# Altium PCB 海关全向控制器Pad转接板V2.PcbDoc
Units mm, origin at the board's own origin, x right, y up, seen from the top; angles counter-clockwise.
Board outline 32 x 10 mm, 2 copper layers (Top Layer, Bottom Layer); 5 components, 7 nets, 27 pads, 0 vias.
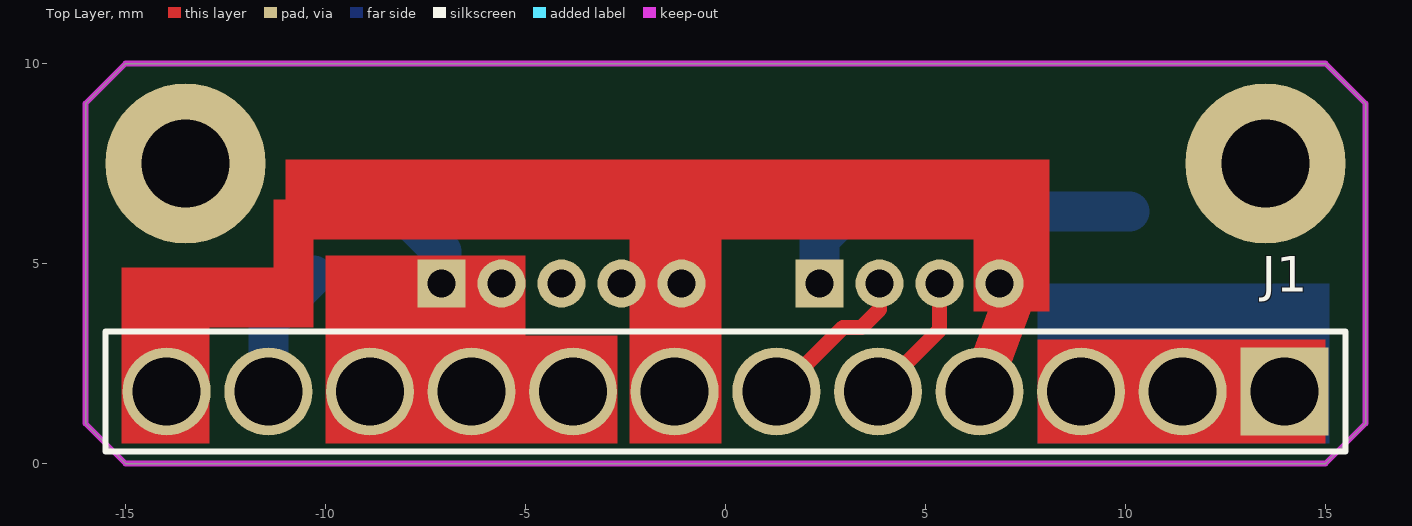
[diagram p0: Top Layer view]
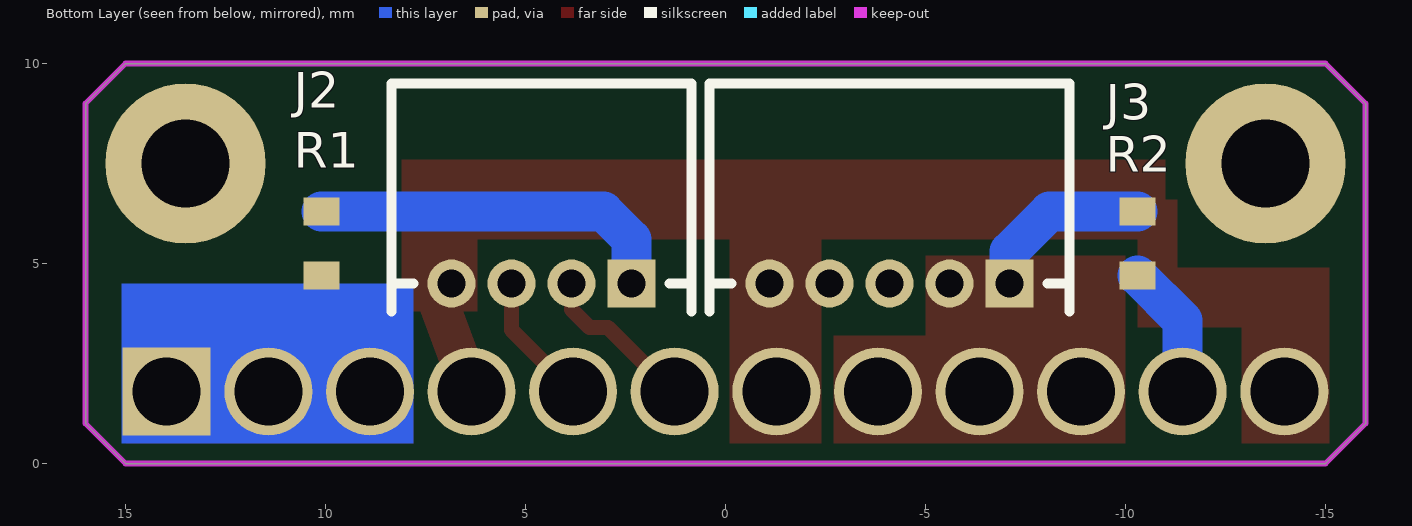
[diagram p1: Bottom Layer view, seen from below]
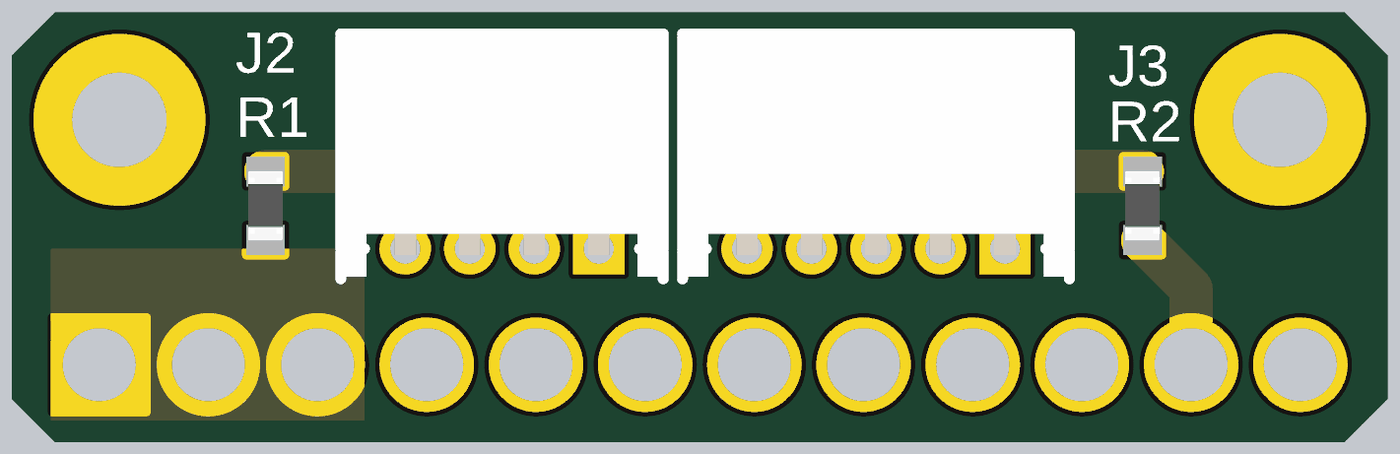
[diagram p2: 3D render of the assembled board from below, using the file's embedded part models]

## Layer stack, top to bottom
Top Solder: solder mask 0.0102, Solder Resist, Dk 3.5
Top Layer: signal copper 0.0356
Dielectric 1: dielectric 0.32, FR-4, Dk 4.8
Bottom Layer: signal copper 0.0356
Bottom Solder: solder mask 0.0102, Solder Resist, Dk 3.5

## Board outline
-16,1 -15,0 15,0 16,1 16,9 15,10 -15,10 -16,9

## Design rules (kind name [scope] priority, off if disabled: settings)
Clearance [All] p1: gap=0.152
ComponentClearance [All] p1: gap=0 collisioncheckmode=3 verticalgap=0 showdistances=FALSE
DiffPairsRouting [All] p1: maxlimit=0.254 minlimit=0.254 mostfreqgap=0.254 toplayer_minwidth=0.381 toplayer_maxwidth=0.381 toplayer_prefwidth=0.381 bottomlayer_minwidth=0.381 bottomlayer_maxwidth=0.381 bottomlayer_prefwidth=0.381 maxuncoupledlength=12.7
Height [All] p1: minheight=0 maxheight=50.8 prefheight=12.7
HoleSize [All] p1: absolutevalues=TRUE maxlimit=5.08 minlimit=0.025 maxpercent=80.000 minpercent=20.000
HoleToHoleClearance [All] p1: gap=0.152 allowstackedmicrovias=TRUE
MinimumSolderMaskSliver [All] p1: minsoldermaskwidth=0
PlaneConnect [All] p1: planeconnectstyle=Direct reliefexpansion=0.508 reliefentries=4 reliefconductorwidth=0.254 reliefairgap=0.254
PolygonConnect [All] p1: connectstyle=Direct reliefconductorwidth=0.254 reliefentries=4 polygonreliefangle="90 Angle" airgapwidth=0.254
RoutingVias [All] p1: holewidth=0.711 width=1.27 viastyle="Through Hole" minholewidth=0.203 minwidth=0.305 maxholewidth=5.08 maxwidth=7.62
SilkToSilkClearance [All] p1: silktosilkclearance=0
SilkToSolderMaskClearance [IsPad] p1: minsilkscreentomaskgap=0 clearancetoexposedcopper=TRUE
SolderMaskExpansion [All] p1: expansion=0.102
Width [All] p1: maxlimit=4 minlimit=0.254 preferedwidth=0.254
20 further rules are at their usual default settings.

## Classes and differential pairs
differential pair USB: +USB_P -USB_N

## Components (designator, comment, footprint, x,y, rotation, side; value= is the part's Value field where it differs from the comment)
J1 "Jack1x12" PPM.12-711-0102 0,1.8 r180 top
J2 "Jack 1x4" ZH-4AWD 4.6,4.5 r0 bottom
J3 "Jack 1x5" ZH-5AWD -4.1,4.5 r0 bottom
R1 "NC" R0603 10.1,5.5 r90 bottom
R2 "NC" R0603 -10.3,5.5 r90 bottom

## Footprints (in the part's own frame and the unit in brackets; to place one, negate y for a bottom-side part, rotate by r counter-clockwise, add the part's x,y. Pads: shape width x height; smd on the part's side, far side on the other; paste and mask are expansions set on the pad)
PPM.12-711-0102 [mm]
  rect 2.2x2.2 hole 1.7: 1(-13.97,0)
  round 2.2 hole 1.7: 2(-11.43,0) 3(-8.89,0) 4(-6.35,0) 5(-3.81,0) 6(-1.27,0) 7(1.27,0) 8(3.81,0) 9(6.35,0) 10(8.89,0) 11(11.43,0) 12(13.97,0)
  silkscreen extent -15.5,-1.5 15.5,1.5
R0603 [mm]
  rect 0.7x0.9 smd: 1(-0.8,0) 2(0.8,0)
  body extent -0.8,-0.4 0.8,0.4, height 0.37
ZH-4AWD [mm] "1.5mm，4P，卧插"
  rect 1.2x1.2 hole 0.7: 1(-2.25,0)
  round 1.2 hole 0.7: 2(-0.75,0) 3(0.75,0) 4(2.25,0)
  silkscreen extent -3.75,-5 3.75,0.7, body extent -3.75,-5.05 3.75,0.65, height 3.95
ZH-5AWD [mm] "1.5mm，5P，卧插"
  rect 1.2x1.2 hole 0.7: 1(-3,0)
  round 1.2 hole 0.7: 2(-1.5,0) 3(0,0) 4(1.5,0) 5(3,0)
  silkscreen extent -4.5,-5 4.5,0.7, body extent -4.5,-5.05 4.5,0.65, height 3.95

## Part data
J1 J2 J3: "插座"
R1 R2: library part Res

## Free pads (board coordinates)
  round 4 hole 2.2: ""(-13.5,7.5) ""(13.5,7.5)

## Nets (pads, with @x,y where several pads share a name; then routed paths per layer and width w, separated by ;. In a path a pad name is that pad's centre, name@x,y a point inside that pad or via, vN(x,y) a via of type N, cw(c..) or ccw(c..) an arc to the next point about the centre after c; other vN are vias at no path point)
GND: J1.4 J1.7 J1.12 J2.4 J3.4 J3.5 | length 2.9
  Top Layer w1: J1.4 J2.4@7.35,4.5
NetJ1_11: J1.11 R2.1 | length 3.4
  Bottom Layer w1: J1.11 -11.43,3.57 R2.1
NetJ2_1: J2.1 R1.2 | length 9.1
  Bottom Layer w1: J2.1 2.35,5.6 3.05,6.3 R1.2
USB_5V: J1.1 J1.2 J1.3 R1.1
USB_N: J1.6 J2.2 | length 4.1
  Top Layer w0.381: J1.6 1.335,1.8 2.935,3.4 3.4,3.4 3.85,3.85 J2.2
USB_P: J1.5 J2.3 | length 3.3
  Top Layer w0.381: J1.5 5.35,3.34 J2.3
VCC_5V: J1.8 J1.9 J1.10 J3.1 J3.2 R2.2 | length 4.4
  Bottom Layer w1: R2.2 -8.1,6.3 -7.1,5.3 J3.1
pads on no net: J3.3

## Keep-outs
Keep-Out Layer:
  the board outline again, w0.152

## Other copper
Top Layer:
  rectangle net USB_5V: 7.8,0.5 15,3.1
  rectangle net VCC_5V: -10,0.5 -5,5.2
  rectangle net VCC_5V: -10,0.5 -2.7,3.2
  rectangle net GND: -2.4,0.5 -0.1,7.6
  rectangle net GND: -15.1,0.5 -12.9,4.9
  rectangle net GND: -15.1,3.4 -10.3,4.9
  rectangle net GND: -11.3,3.4 -10.3,6.6
  rectangle net GND: -11,5.6 7.5,7.6
  rectangle net GND: 6.2,3.8 8.1,7.6
Bottom Layer:
  rectangle net USB_5V: 7.8,0.5 15.1,4.5